# Altium PCB PCB.PcbDoc
Units mm, origin at the board's own origin, x right, y up, seen from the top; angles counter-clockwise.
Board outline 30 x 38 mm, 2 copper layers (Top Layer, Bottom Layer), stack 1.58 mm thick; 2 components, 7 nets, 39 pads, 4 vias.
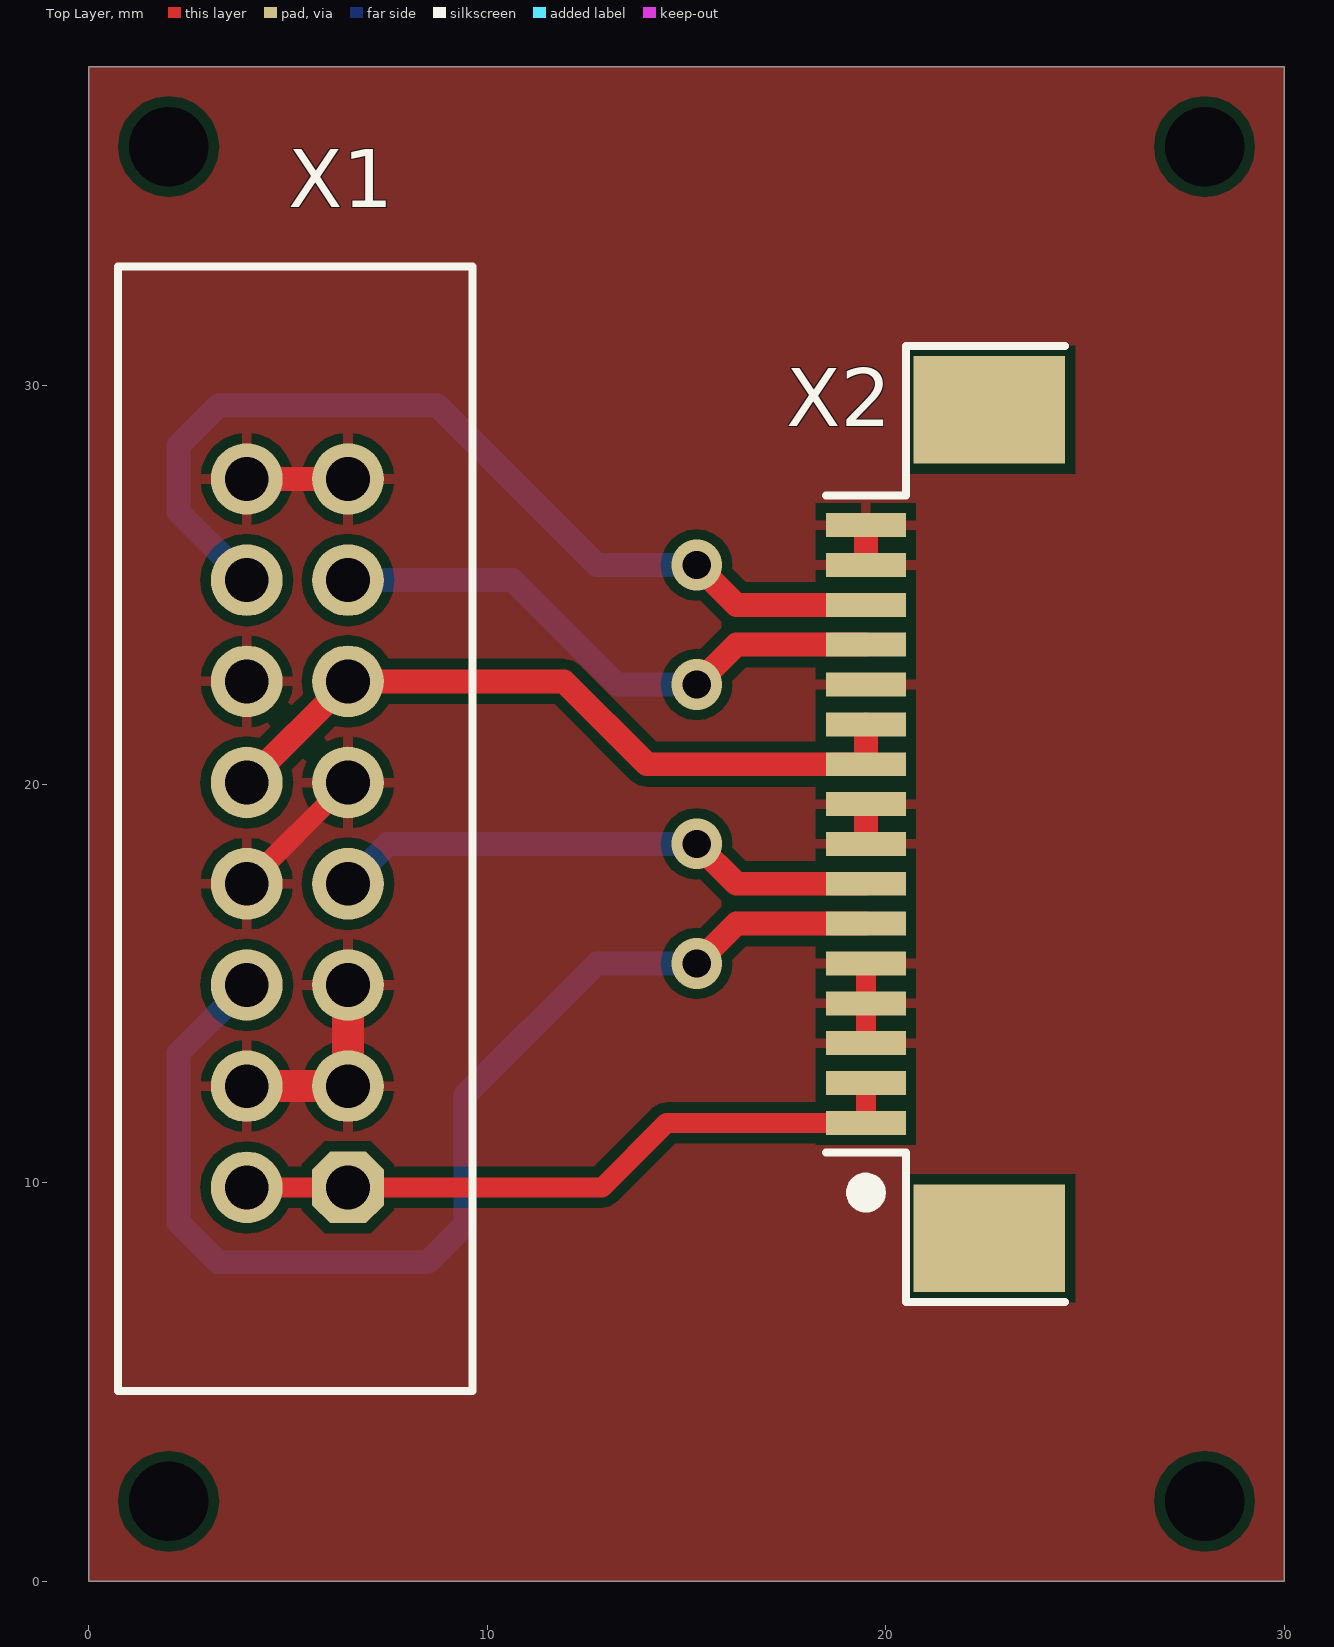
[diagram p0: Top Layer view]
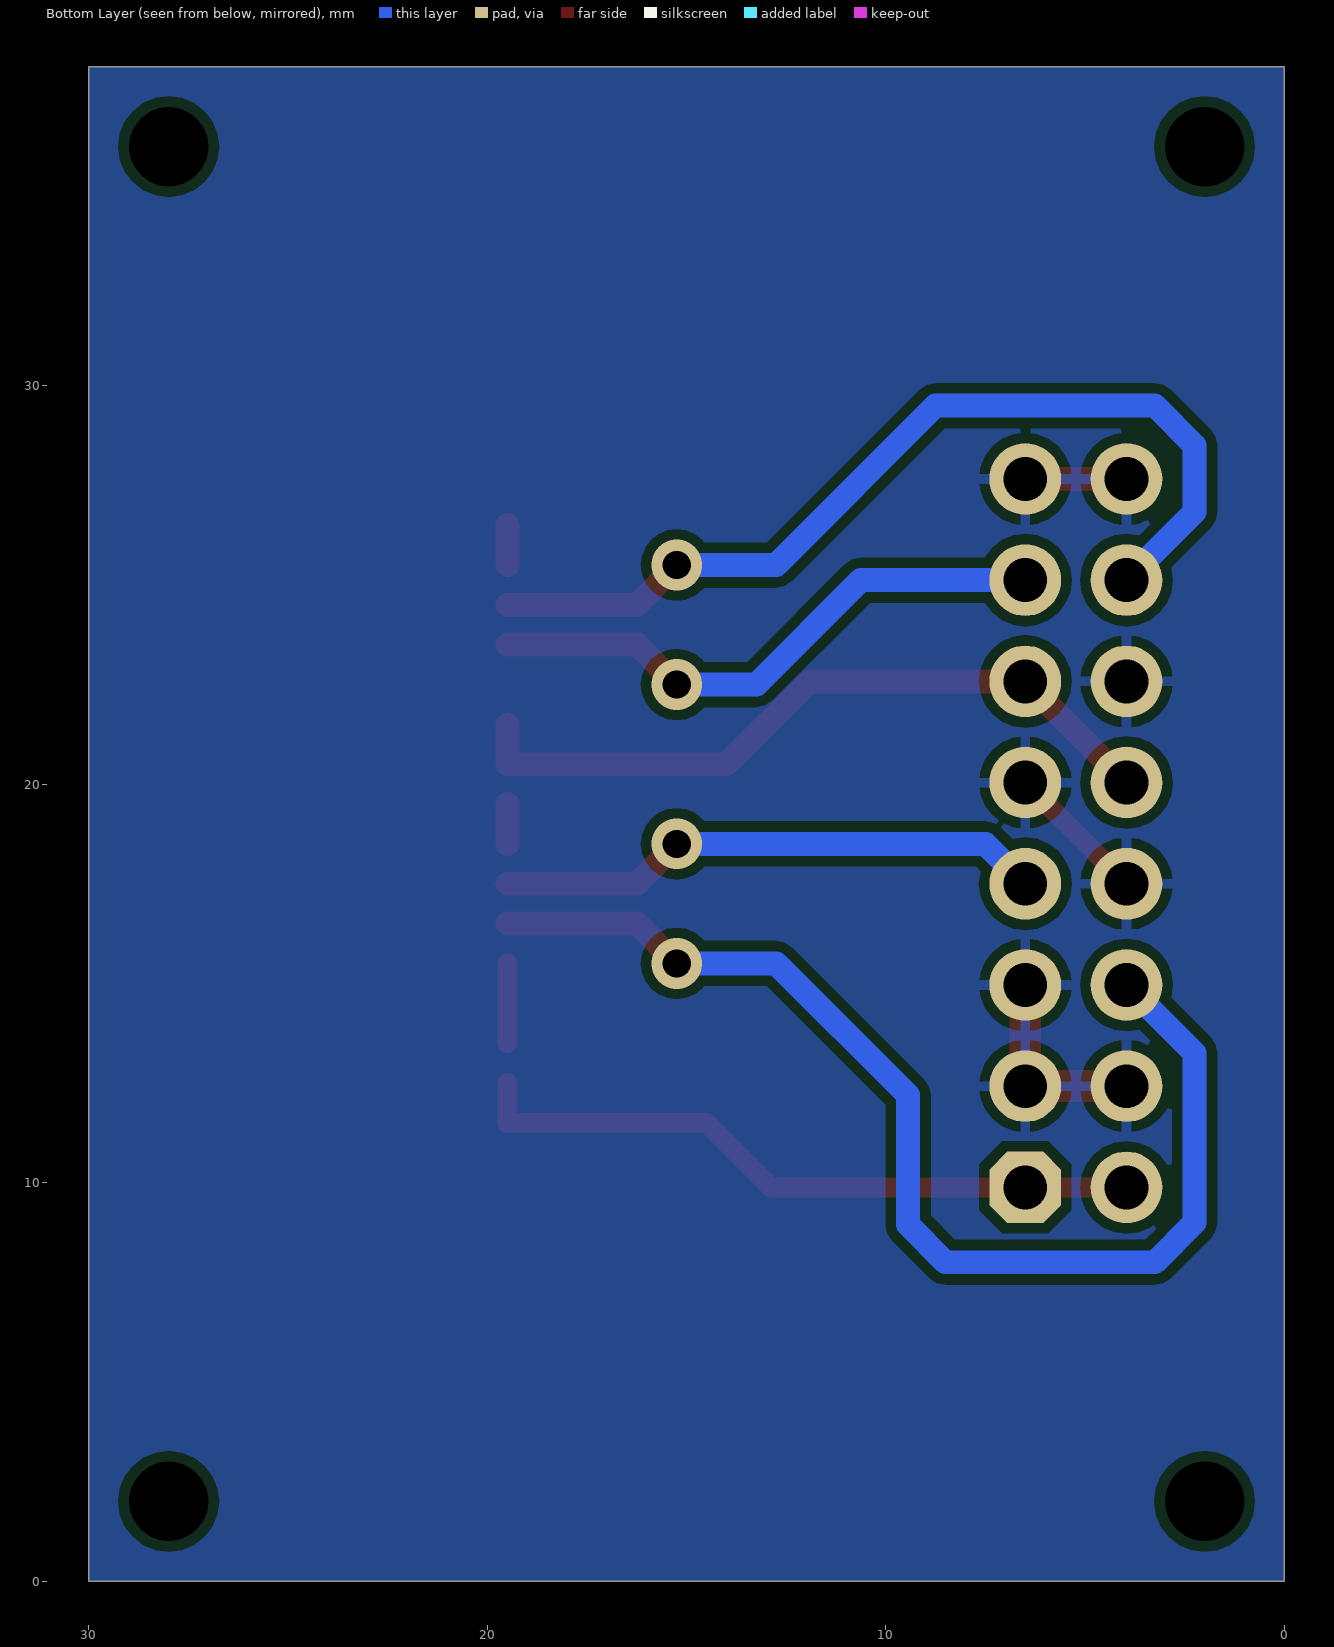
[diagram p1: Bottom Layer view, seen from below]

## Layer stack, top to bottom
Top Solder: solder mask 0.0102, Solder Resist, Dk 3.5
Top Layer: signal copper 0.0356
Dielectric 1: dielectric 1.509, FR-4, Dk 4.8
Bottom Layer: signal copper 0.0356
Bottom Solder: solder mask 0.0102, Solder Resist, Dk 3.5

## Board outline
0,0 0,38 30,38 30,0

## Design rules (kind name [scope] priority, off if disabled: settings)
Clearance [All] p1: gap=0.254 ignorepadtopadclearanceinfootprint=FALSE except(0: Arc-Hole Track-Hole SMDPad-Hole THPad-Hole Via-Hole Fill-Hole Poly-Hole Region-Hole Text-Hole; 0.2: Arc-THPad Track-THPad)
PolygonConnect [All] p1: connectstyle=Relief reliefconductorwidth=0.254 reliefentries=4 polygonreliefangle="90 Angle" airgapwidth=0.254
RoutingVias [All] p1: holewidth=0.711 width=1.27 viastyle="Through Hole" minholewidth=0.711 minwidth=1.27 maxholewidth=0.711 maxwidth=1.27
SolderMaskExpansion [All] p1: expansion=0.102 istentingtop=FALSE
Width [All] p1: maxlimit=5 minlimit=0.2 preferedwidth=0.6
30 further rules are at their usual default settings.

## Components (designator, comment, footprint, x,y, rotation, side; value= is the part's Value field where it differs from the comment)
X1 "Connector, 16pin, 2.54mm, 250VAC, 3A" "CON: IDC-16MS" 5.23,18.77 r90 top
X2 "\"Разъем\"" "CON: 52207-1633, FFC / FPC" 19.5,11.5 r90 top

## Footprints (in the part's own frame and the unit in brackets; to place one, negate y for a bottom-side part, rotate by r counter-clockwise, add the part's x,y. Pads: shape width x height; smd on the part's side, far side on the other; paste and mask are expansions set on the pad)
"CON: 52207-1633, FFC / FPC" [mm]
  rect 2.7x3.8 smd: 0(-2.9,-3.1) 0(17.9,-3.1)
  rect 0.6x2 smd: 1(0,0) 2(1,0) 3(2,0) 4(3,0) 5(4,0) 6(5,0) 7(6,0) 8(7,0) 9(8,0) 10(9,0) 11(10,0) 12(11,0) 13(12,0) 14(13,0) 15(14,0) 16(15,0)
  silkscreen extent -4.5,-5 19.5,1, body extent -3.65,-6.8 18.65,0.8, height 2.75
"CON: IDC-16MS" [mm] "IDC-16MS straight leads pcb mount"
  oct 1.8x1.8 hole 1.1: 1(-8.89,-1.27)
  round 1.8 hole 1.1: 2(-8.89,1.27) 3(-6.35,-1.27) 4(-6.35,1.27) 5(-3.81,-1.27) 6(-3.81,1.27) 7(-1.27,-1.27) 8(-1.27,1.27) 9(1.27,-1.27) 10(1.27,1.27) 11(3.81,-1.27) 12(3.81,1.27) 13(6.35,-1.27) 14(6.35,1.27) 15(8.89,-1.27) 16(8.89,1.27)
  round 0.5 on Mech1: 39(-13.5,-3.9)
  silkscreen extent -14,-4.4 14.22,4.5, body extent -13.98,-4.4 13.99,4.4, height 9.1

## Part data
X1: library part IDC-16, CurrentMax=3A, Manufacturer=Connfly, VoltageMax=250VAC, CommentText="\"Разъем\"", HelpURL=https://www.chipdip.ru/product/idc-16ms, Multichannel=16pin, PartNumber=IDC-16, Pin_1=Лазер, Pin_2=Лазер, Pin_3=GND, Pin_4=GND, Pin_5=GND, Pin_6="Энкодер 1", Pin_7="Энкодер 2", Pin_8=GND, Pin_9=GND, Pin_10=+5В, Pin_11=+5В, Pin_12=GND, Pin_13="Камера D-", Pin_14="Камера D+", Pin_15=GND, Pin_16=GND, Pitch=2.54mm, TypeConnector=Connector, ValueManufacturerPartNumber="Connector, 16pin, 2.54mm, 250VAC, 3A"
X2: library part "52207-1633, FFC / FPC", Pin_1=Лазер, Pin_2=Лазер, Pin_3=GND, Pin_4=GND, Pin_5=GND, Pin_6="Энкодер 1", Pin_7="Энкодер 2", Pin_8=GND, Pin_9=GND, Pin_10=+5В, Pin_11=+5В, Pin_12=GND, Pin_13="Камера D-", Pin_14="Камера D+", Pin_15=GND, Pin_16=GND

## Free pads (board coordinates)
  round 0 hole 2: 2(2,36) 3(28,36) 4(28,2) 5(2,2)

## Via types
v1: diameter 1.27, hole 0.711, Top Layer to Bottom Layer, tented both sides, 4 vias

## Nets (pads, with @x,y where several pads share a name; then routed paths per layer and width w, separated by ;. In a path a pad name is that pad's centre, name@x,y a point inside that pad or via, vN(x,y) a via of type N, cw(c..) or ccw(c..) an arc to the next point about the centre after c; other vN are vias at no path point)
NetX1_1: X1.1 X1.2 X2.1 X2.2 | length 17.2
  Top Layer w0.5: X1.2 X1.1 12.88,9.88 14.5,11.5 X2.1 X2.2
NetX1_3: X1.3 X1.4 X1.5 X1.8 X1.9 X1.12 X1.15 X1.16 X2.3 X2.4 X2.5 X2.8 X2.9 X2.12 X2.15 X2.16 | length 15.5
  Top Layer w0.5: X1.8 X1.9 ; X2.3 X2.4 ; X2.4@19.5,14.75 X2.4 ; X2.5 X2.4
  Top Layer w0.6: X1.16 X1.15 ; X2.8 X2.9 ; X2.15 X2.16
  Top Layer w0.8: X1.4 X1.3 X1.5
NetX1_6: X1.6 X2.6 | length 29.8
  Top Layer w0.6: v1(15.25,15.5) 16.25,16.5 X2.6
  Bottom Layer w0.6: X1.6 2.25,13.25 2.25,9 3.25,8 8.5,8 9.444,8.944 9.444,12.194 12.75,15.5 v1(15.25,15.5)
NetX1_7: X1.7 X2.7 | length 13.8
  Top Layer w0.6: v1(15.25,18.5) 16.25,17.5 X2.7
  Bottom Layer w0.6: X1.7 7.5,18.5 v1(15.25,18.5)
NetX1_10: X1.10 X1.11 X2.10 X2.11 | length 18.5
  Top Layer w0.6: X1.10 X1.11 11.92,22.58 14,20.5 X2.10 X2.11
NetX1_13: X1.13 X2.13 | length 14.5
  Top Layer w0.6: v1(15.25,22.5) 16.25,23.5 X2.13
  Bottom Layer w0.6: X1.13 10.63,25.12 13.25,22.5 v1(15.25,22.5)
NetX1_14: X1.14 X2.14 | length 23.8
  Top Layer w0.6: v1(15.25,25.5) 16.25,24.5 X2.14
  Bottom Layer w0.6: X1.14 2.25,26.83 2.25,28.5 3.25,29.5 8.75,29.5 12.75,25.5 v1(15.25,25.5)
pads on no net: X1.39 X2.0

## Polygon pours and split planes (outlines as drawn)
NetX1_3 on Top Layer "Top Layer-No Net" (solid, remove dead copper, pour order 2): 0,38 30,38 30,0 0,0
NetX1_3 on Bottom Layer "Top Layer-No Net" (solid, remove dead copper, pour order 4): 0,38 30,38 30,0 0,0

## Silkscreen, mask and mechanical layers (free items; w line width, h text height)
Border:
  the board outline again, w0.2

## Dimensions
0,0 to 0,38 on Size
0,38 to 30,38 on Size